# Altium PCB Bop-it_main_PCB.PcbDoc
Units mil, origin at the board's own origin, x right, y up, seen from the top; angles counter-clockwise.
Board outline 3608.89 x 2382.47 mil, 2 copper layers (Top Layer, Bottom Layer); 26 components, 22 nets, 99 pads, 4 vias.
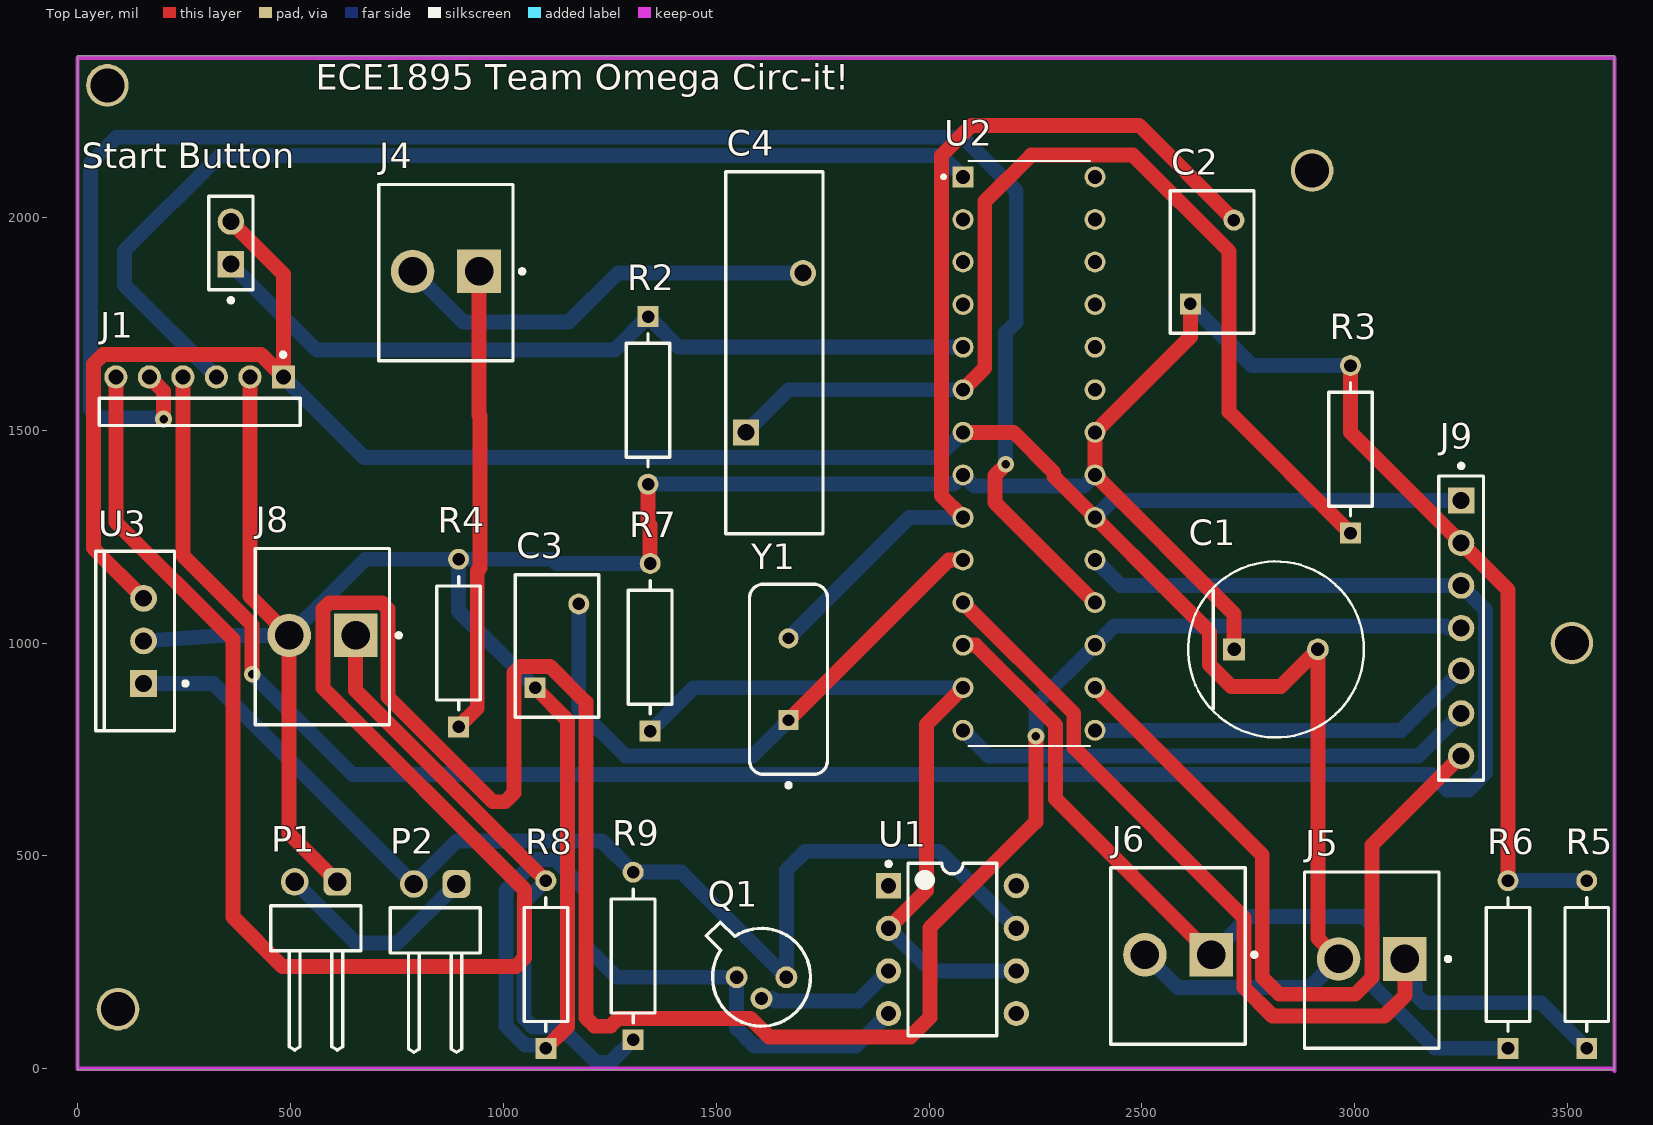
[diagram p0: Top Layer view]
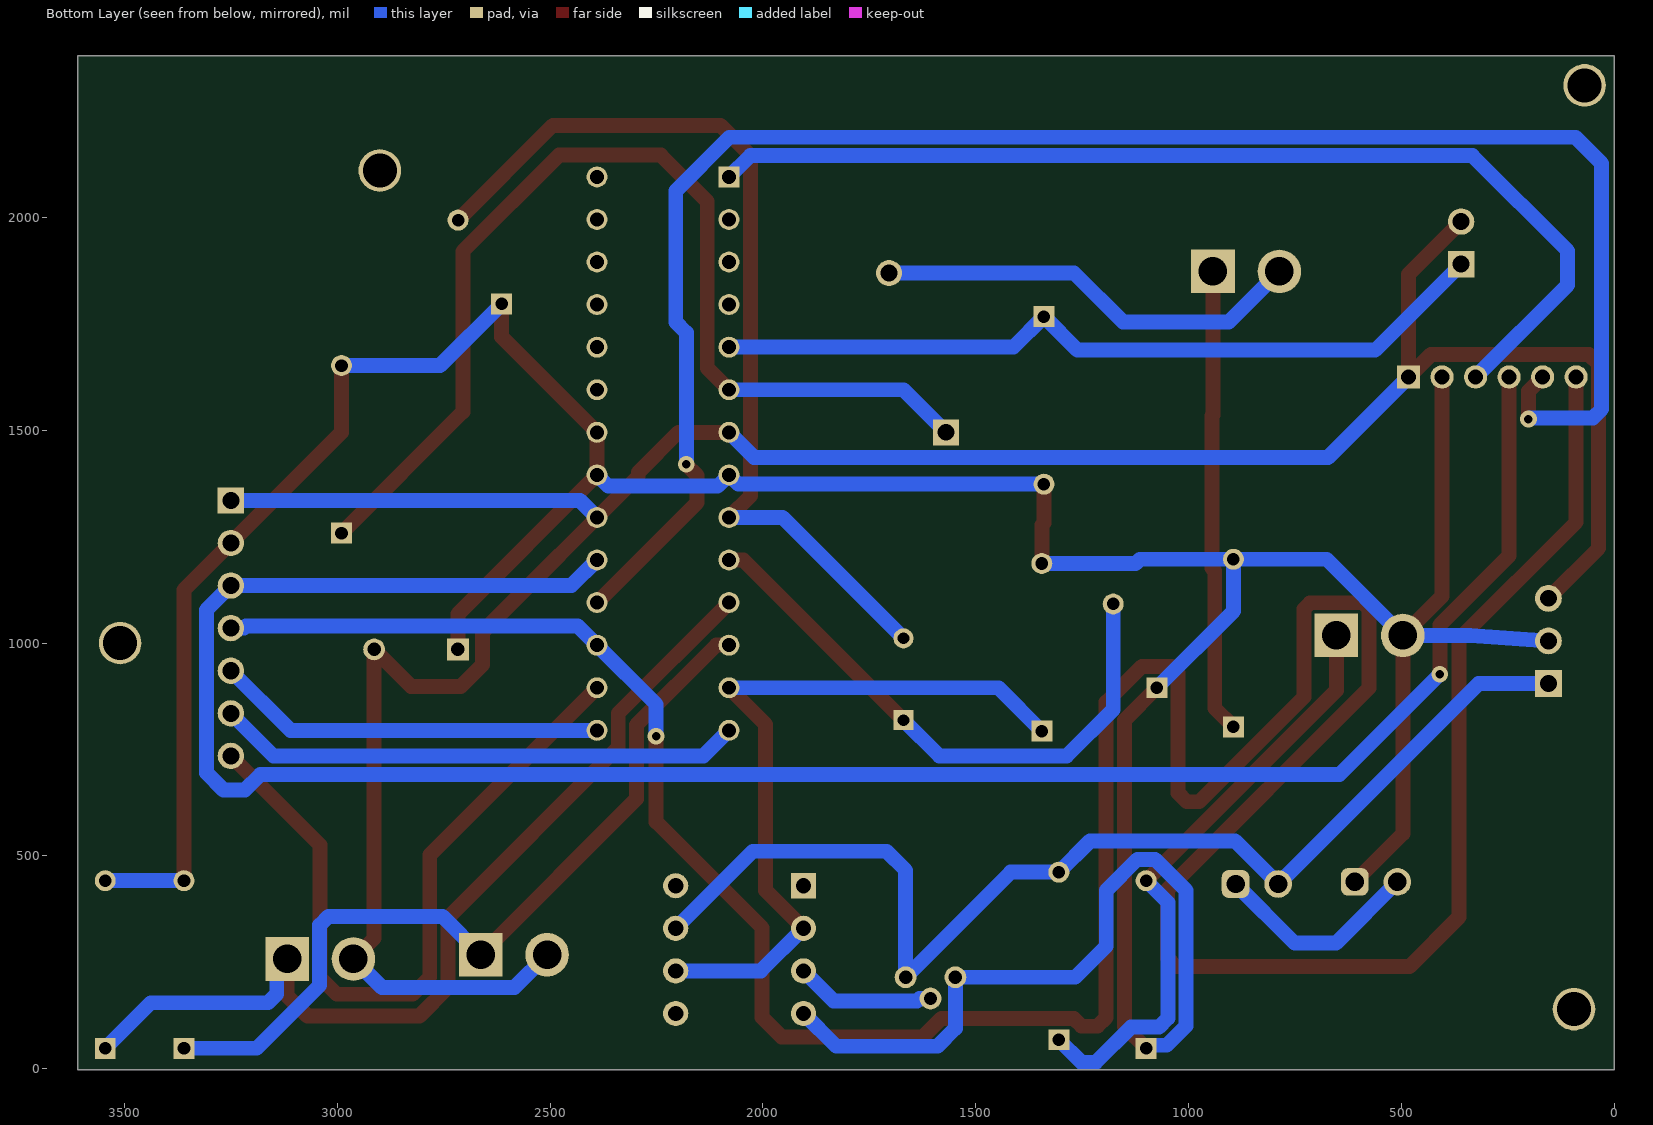
[diagram p1: Bottom Layer view, seen from below]
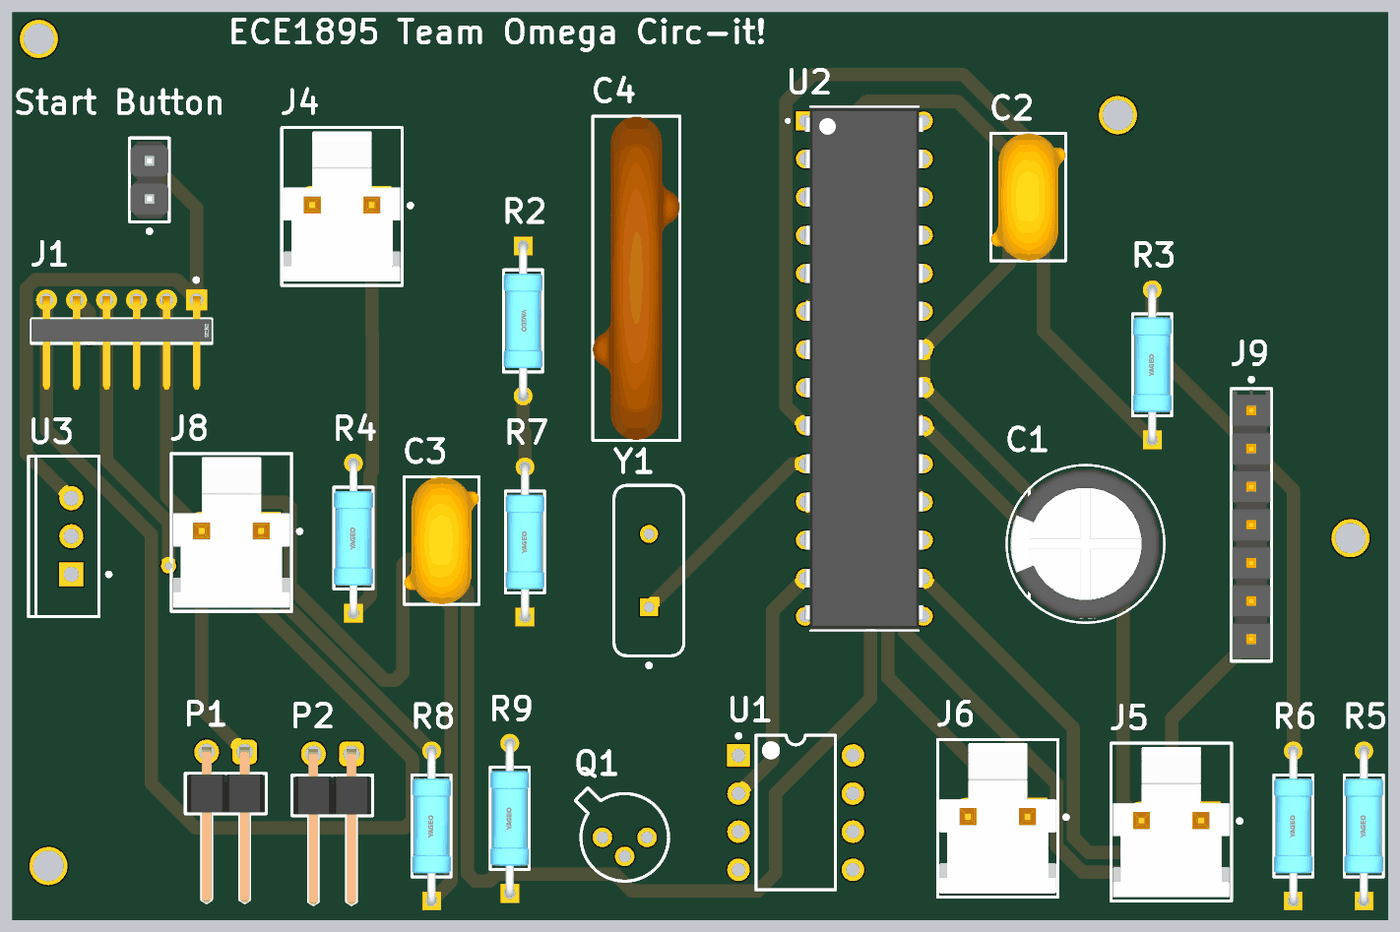
[diagram p2: 3D render of the assembled board from above, using the file's embedded part models]

## Layer stack, top to bottom
Top Solder: solder mask 0.4, Solder Resist, Dk 3.5
Top Layer: signal copper 1.4
Dielectric 1: dielectric 12.6, FR-4, Dk 4.8
Bottom Layer: signal copper 1.4
Bottom Solder: solder mask 0.4, Solder Resist, Dk 3.5

## Board outline
0.11,-2.5 3609,-2.5 3609,2379.97 0.11,2379.97

## Design rules (kind name [scope] priority, off if disabled: settings)
BoardOutlineClearance [All] p1: gap=7.87 ignorepadtopadclearanceinfootprint=FALSE except(15.75: Arc-SplitBarrior Arc-SplitContinuation Track-SplitBarrior Track-SplitContinuation SMDPad-SplitBarrior SMDPad-SplitContinuation THPad-SplitBarrior THPad-SplitContinuation Via-SplitBarrior Via-SplitContinuation Fill-SplitBarrior Fill-SplitContinuation Poly-SplitBarrior Poly-SplitContinuation Region-SplitBarrior Region-SplitContinuation Text-SplitBarrior Text-SplitContinuation)
Clearance "Clearance Bottom Layer" [OnLayer('Bottom Layer')] p1: gap=8 ignorepadtopadclearanceinfootprint=TRUE except(10: Arc-Text Track-Text SMDPad-Text THPad-Text Via-Text Fill-Text Poly-Text Region-Text Text-Text)
Clearance "Clearance Top Layer" [OnLayer('Top Layer')] p2: gap=8 ignorepadtopadclearanceinfootprint=TRUE except(10: Arc-Text Track-Text SMDPad-Text THPad-Text Via-Text Fill-Text Poly-Text Region-Text Text-Text)
Clearance Clearance_1 [OnMid vs OnMid] p3: gap=7.87 ignorepadtopadclearanceinfootprint=FALSE except(3.5: Arc-Arc Arc-Track Arc-SMDPad Track-Track Track-SMDPad SMDPad-SMDPad; 5: Arc-Via Track-Via SMDPad-Via THPad-Via Via-Via; 10: Arc-Text Track-Text SMDPad-Text THPad-Text Via-Text Fill-Text Poly-Text Region-Text Text-Text)
Clearance Clearance_2 [(ExistsOnLayer('Top Layer') Or ExistsOnLayer('Bottom Layer')) vs (ExistsOnLayer('Top Layer') Or ExistsOnLayer('Bottom Layer'))] p4: gap=7.87 ignorepadtopadclearanceinfootprint=FALSE except(3.5: Arc-Arc Arc-Track Arc-SMDPad Track-Track Track-SMDPad SMDPad-SMDPad; 5: Arc-Via Track-Via SMDPad-Via THPad-Via Via-Via; 10: Arc-Text Track-Text SMDPad-Text THPad-Text Via-Text Fill-Text Poly-Text Region-Text Text-Text)
Clearance [All] p5: gap=7.87 ignorepadtopadclearanceinfootprint=FALSE except(3.5: Arc-Arc Arc-Track Arc-SMDPad Track-Track Track-SMDPad SMDPad-SMDPad; 5: Arc-Via Track-Via SMDPad-Via THPad-Via Via-Via; 10: Arc-Text Track-Text SMDPad-Text THPad-Text Via-Text Fill-Text Poly-Text Region-Text Text-Text)
HoleSize [All] p1: absolutevalues=TRUE maxlimit=248.03 minlimit=7.87 maxpercent=80.000 minpercent=20.000
MinimumAnnularRing [All] p1: minimumring=3
MinimumSolderMaskSliver [All] p1: minsoldermaskwidth=3.94
PolygonConnect PolygonConnect_1 [All] p1: thpad.connectstyle=Relief thpad.reliefconductorwidth=20 thpad.reliefentries=4 thpad.polygonreliefangle="90 Angle" thpad.airgapwidth=10 smdpad.connectstyle=Relief smdpad.reliefconductorwidth=20 smdpad.reliefentries=4 smdpad.polygonreliefangle="90 Angle" smdpad.airgapwidth=10 via.connectstyle=Direct via.reliefconductorwidth=20 via.reliefentries=4 via.polygonreliefangle="90 Angle" via.airgapwidth=10
RoutingCorners [All] p1: cornerstyle=Round minsetback=100 maxsetback=100
RoutingVias [All] p1: holewidth=19.68 width=39.37 viastyle="Through Hole" minholewidth=7.87 minwidth=17.72 maxholewidth=39.37 maxwidth=78.74
SilkToSilkClearance [All] p1: silktosilkclearance=3.94
SilkToSolderMaskClearance [IsPad] p1: minsilkscreentomaskgap=3.94 clearancetoexposedcopper=TRUE
SolderMaskExpansion [All] p1: expansion=4 istentingtop=FALSE
Width MaxMinWidth_1 [All] p1: maxlimit=150 minlimit=10 preferedwidth=35 minimp=50.000000 maximp=50.000000 favimp=50.000000
Width [All] p2: maxlimit=100 minlimit=3.5 preferedwidth=15
25 further rules are at their usual default settings.

## Components (designator, comment, footprint, x,y, rotation, side; value= is the part's Value field where it differs from the comment)
C1 "EEUED2G100" FP-RAD-TH-D_10_0_5-L_20_2-MFG 2815,985 r0 top
C2 "F471K33Y5RP6UK5R" FP-F471K33Y5RP6UK5R-MFG 2665,1895 r90 top
C3 "F471K33Y5RP6UK5R" FP-F471K33Y5RP6UK5R-MFG 1126.18,993.43 r90 top
C4 ".047uF" FP-440LS10-R-MFG 1636.93,1682.01 r90 top
J1 "PRGRM" FP-TMM-106-01-G-S-RA-MFG 286.89,1545.47 r0 top
J4 "Speaker" FP-26-61-4020-MFG 865,1870 r0 top
J5 "Test" FP-26-61-4020-MFG 3040,255 r0 top
J6 "Press" FP-26-61-4020-MFG 2585,265 r0 top
J8 "UV emitter" FP-26-61-4020-MFG 575,1015 r0 top
J9 "OLED" FP-TSW-107-07-G-S-MFG 3250,1035 r270 top
P1 "Battery" 61300211021 560,330 r0 top
P2 "On Switch" 61300211021 840,325 r0 top
Q1 "2N2222" MLTC-TO-18-3 1606.54,215 r0 top
R2 "6700" FP-MFR-25-MFG 1340,1570 r270 top value=1.18kΩ
R3 "1000" FP-MFR-25-MFG 2990,1455 r90 top value=1.18kΩ
R4 "1000" FP-MFR-25-MFG 895,1000 r90 top value=1.18kΩ
R5 "1000" FP-MFR-25-MFG 3545,245 r90 top value=1.18kΩ
R6 "1000" FP-MFR-25-MFG 3360,245 r90 top value=1.18kΩ
R7 "1000" FP-MFR-25-MFG 1345,990 r90 top value=1.18kΩ
R8 "180" FP-MFR-25-MFG 1100,245 r90 top value=1.18kΩ
R9 "670" FP-MFR-25-MFG 1305,265 r90 top value=1.18kΩ
"Start Button" "M20-9990246" FP-M20-9990246-MFG 360,1940 r90 top
U1 "LM741CN" N08E 2055,280 r0 top
U2 "ATMEGA328-PU" DIP787W46P254L3467H508Q28 2235,1445 r0 top
U3 "LM340T-5.0" NDE0003A 155,1005 r90 top
Y1 "Crystal" FOX-FOXSLF080-20 1670,915 r90 top

## Footprints (in the part's own frame and the unit in brackets; to place one, negate y for a bottom-side part, rotate by r counter-clockwise, add the part's x,y. Pads: shape width x height; smd on the part's side, far side on the other; paste and mask are expansions set on the pad)
61300211021 [mm] "Pin Header, pitch 2.54 mm, THT, Angled, single row, 2p"
  rrect50% 1.65x1.65 hole 1.1: 1(1.27,2.77)
  round 1.65 hole 1.1: 2(-1.27,2.77)
  silkscreen extent -2.69,-7.27 2.69,1.34, body extent -2.54,-7.27 2.54,3.09, height 2.58
DIP787W46P254L3467H508Q28 [mm]
  rect 1.25x1.25 / inner round 1.25 / far side rect 1.25x1.25 hole 0.83: 1(-3.937,16.51)
  round 1.25 hole 0.83: 2(-3.937,13.97) 3(-3.937,11.43) 4(-3.937,8.89) 5(-3.937,6.35) 6(-3.937,3.81) 7(-3.937,1.27) 8(-3.937,-1.27) 9(-3.937,-3.81) 10(-3.937,-6.35) 11(-3.937,-8.89) 12(-3.937,-11.43) 13(-3.937,-13.97) 14(-3.937,-16.51) 15(3.937,-16.51) 16(3.937,-13.97) 17(3.937,-11.43) 18(3.937,-8.89) 19(3.937,-6.35) 20(3.937,-3.81) 21(3.937,-1.27) 22(3.937,1.27) 23(3.937,3.81) 24(3.937,6.35) 25(3.937,8.89) 26(3.937,11.43) 27(3.937,13.97) 28(3.937,16.51)
  silkscreen extent -5.2,-17.45 3.62,17.45, body extent -3.95,-17.34 3.95,17.34, height 4.57
FOX-FOXSLF080-20 [mm] "THD, 2-Leads, Body 11.35x4.65mm"
  rect 1.2x1.2 hole 0.7: 1(-2.44,0)
  round 1.2 hole 0.7: 2(2.44,0)
  silkscreen extent -6.45,-2.33 5.68,2.33, body extent -5.67,-2.32 5.68,2.33, height 3.6
FP-26-61-4020-MFG [mm]
  rect 2.6x2.6 hole 1.7 paste-2539.97 mask+0: 1(1.98,0.075)
  round 2.6 hole 1.7 paste-2539.97 mask+0: 2(-1.98,0.075)
  silkscreen extent -4.01,-5.26 4.68,5.26, body extent -4.11,-5.36 4.11,5.36, height 0.25
FP-440LS10-R-MFG [mm]
  rect 1.55x1.55 hole 1 paste-2539.97 mask+0: 1(-4.75,1.7)
  round 1.55 hole 1 paste-2539.97 mask+0: 2(4.75,-1.7)
  silkscreen extent -10.8,-2.9 10.8,2.9, body extent -10.9,-3 10.9,3, height 0.25
FP-F471K33Y5RP6UK5R-MFG [mm]
  rect 1.25x1.25 hole 0.75 paste-2539.97 mask+0: 1(-2.5,1.3)
  round 1.25 hole 0.75 paste-2539.97 mask+0: 2(2.5,-1.3)
  silkscreen extent -4.25,-2.5 4.25,2.5, body extent -4.35,-2.6 4.35,2.6, height 0.25
FP-M20-9990246-MFG [mm]
  rect 1.57x1.57 hole 1.02 paste-2539.97 mask+0: 1(-1.27,0)
  round 1.57 hole 1.02 paste-2539.97 mask+0: 2(1.27,0)
  silkscreen extent -3.55,-1.32 2.79,1.32, body extent -2.89,-1.42 2.89,1.42, height 0.25
FP-MFR-25-MFG [mm]
  rect 1.25x1.25 hole 0.75 paste-2539.97 mask+0: 1(-5,0)
  round 1.25 hole 0.75 paste-2539.97 mask+0: 2(5,0)
  silkscreen extent -3.97,-1.3 3.97,1.3, body extent -5.72,-1.4 5.72,1.4, height 0.25
FP-RAD-TH-D_10_0_5-L_20_2-MFG [mm]
  rect 1.3x1.3 hole 0.8 paste-2539.97 mask+0: 1(-2.5,0)
  round 1.3 hole 0.8 paste-2539.97 mask+0: 2(2.5,0)
  silkscreen extent -5.25,-5.25 5.25,5.25, body extent -5.35,-5.35 5.35,5.35, height 0.25
FP-TMM-106-01-G-S-RA-MFG [mm]
  rect 1.39x1.39 hole 0.89 paste-2539.97 mask+0: 1(5,2.02)
  round 1.39 hole 0.89 paste-2539.97 mask+0: 2(3,2.02) 3(1,2.02) 4(-1,2.02) 5(-3,2.02) 6(-5,2.02)
  silkscreen extent -6,-0.88 6,3.47, body extent -6.1,-4.3 6.1,2.82, height 0.25
FP-TSW-107-07-G-S-MFG [mm]
  rect 1.57x1.57 hole 1.02 paste-2539.97 mask+0: 1(-7.62,0)
  round 1.57 hole 1.02 paste-2539.97 mask+0: 2(-5.08,0) 3(-2.54,0) 4(0,0) 5(2.54,0) 6(5.08,0) 7(7.62,0)
  silkscreen extent -9.8,-1.34 9.08,1.34, body extent -9.18,-1.44 9.18,1.44, height 0.25
MLTC-TO-18-3 [mm] "TO-18, 3-Leads"
  round 1.3 hole 0.8: 1(-1.485,0) 2(0,-1.27) 3(1.485,0)
  silkscreen extent -3.29,-2.92 2.92,3.29, body extent -3.29,-2.93 2.93,3.29, height 5.33
N08E [mm] "DIP, 8-Pin, Row Spacing 7.62 mm, Pitch 2.54 mm"
  rect 1.5x1.5 hole 0.9: 1(-3.81,3.81)
  round 1.5 hole 0.9: 2(-3.81,1.27) 3(-3.81,-1.27) 4(-3.81,-3.81) 5(3.81,-3.81) 6(3.81,-1.27) 7(3.81,1.27) 8(3.81,3.81)
  silkscreen extent -3.93,-5.15 2.65,5.23, body extent -3.6,-5.15 3.6,5.15, height 5.33
NDE0003A [mm] "FM, 3-Leads, Body 10.7x4.7mm, Pitch 2.54mm"
  rect 1.6x1.6 hole 1: 1(-2.54,0)
  round 1.6 hole 1: 2(0,0) 3(2.54,0)
  silkscreen extent -5.35,-2.63 5.35,2.85, body extent -5.4,-1.9 5.4,2.9, height 19.4

## Part data
C1: library part CMP-05427-001613-1, "Aluminum Electrolytic Capacitors (Radial Lead Type) 10uF ±20% 400V", Capacitance=10uF, Case/Package=Radial, Dielectric Material=Aluminium, Max Operating Temperature=105°C, Min Operating Temperature=-25°C, Package Quantity=200, Ripple Current=300mA, Tolerance=20%, Voltage=400V, Construction=RADIAL, Contact Plating=Tin, Diameter=10mm, Dissipation Factor=0.24%, Height=20mm, Height - Seated (Max)=0.787inch, Lead Diameter=0.6mm, Lead Free="Lead Free", Lead Pitch=5mm, Length=20mm, Life (Hours)=8000Hour, Mount="Through Hole", Number of Pins=2, Packaging=Bulk, Polarity=Polar, Radiation Hardening=No, REACH SVHC="No SVHC", Ripple Current (AC)=300mA, RoHS Compliant=Yes, Series=ED, Termination=Radial, Voltage Rating=400V, Voltage Rating (DC)=400V
C2 C3: library part CMP-02417-000080-1, "CAP CER 470PF 2KV Y5R RADIAL", Capacitance=470pF, Case/Package=Radial, Dielectric=Y5R, Dielectric Material=Ceramic, Insulation Resistance=10GR, Max Operating Temperature=125°C, Min Operating Temperature=-30°C, Package Quantity=1500, Tolerance=10%, Voltage=2kV, Construction=RADIAL, Depth=5mm, Lead Diameter=0.8mm, Lead Pitch=5mm, Lead/Base Style=Kinked, Length=8.5mm, Mount="Through Hole", Packaging="Tape and Reel", Radiation Hardening=No, Resistor Type=Ceramic, RoHS Compliant=Yes, Series=F, Termination=Radial, Voltage Rating=2kV
C4: library part CMP-02417-000073-1, "CAP CER 10000PF 760VAC Y5U RDL", Capacitance=10nF, Case/Package=Radial, Dielectric=Y5U, Max Operating Temperature=125°C, Min Operating Temperature=-30°C, Package Quantity=100, Resistor Type=Ceramic, Tolerance=20%, Voltage=760V, Voltage Rating=250V, Voltage Rating (AC)=500V, Construction=RADIAL, Contact Plating=Tin, Depth=5.8mm, Diameter=21.6mm, Dissipation Factor=2%, Height=5.8mm, Height - Seated (Max)=0.976inch, Lead Diameter=0.81mm, Lead Free="Lead Free", Lead Length=28.8mm, Lead Pitch=9.5mm, Mount="Through Hole", Number of Pins=2, Packaging=Bulk, Radiation Hardening=No, RoHS Compliant=Yes, Series=440L, Termination=Radial
J1: library part CMP-02766-001725-1, "Connector Header Through Hole, Right Angle 6 position 0.079\" (2.00mm)", Color=Black, Max Current Rating=3.9A, Max Operating Temperature=125°C, Max Voltage Rating (AC)=500V, Min Operating Temperature=-55°C, Connector Type=Header, Contact Finish - Mating=GOLD, Contact Material=Bronze, Contact Mating Length=0.126inch, Contact Plating=Gold, Contact Shape=Square, Contact Type="Male Pin", Depth=5.97mm, Fastening Type=Pull, Gender=Male, Housing Color=Black, Housing Material=Polymer, Insulation Color=Black, Insulation Material=Polymer, Length=12mm, Mount="Through Hole", Number of Contacts=6, Number of Positions=6, Number of Rows=1, Orientation="Right Angle", Packaging=Bulk, Pitch=2mm, Radiation Hardening=No, RoHS Compliant=Yes, Series=TMM, Termination=Solder
J4 J5 J6 J8: library part CMP-00257-00277943-1, "26-61-4020 3.96mm (.156\") Pitch KK® Solid Header, Vertical, Friction Lock, 2 Circuits, Gold (Au) Plating", Color=Natural, Contact Resistance=6mΩ, Current Rating=7A, Flammability Rating="UL94 V-0", Insulation Resistance=50GΩ, Manufacturer Lifecycle Status=ACTIVE, Max Operating Temperature=75°C, Max Voltage Rating (AC)=250V, Min Operating Temperature=0°C, Contact Material=Brass, Contact Plating=Gold, Country of Origin=US, Depth=10.01mm, Gender=Male, Glow Wire Compliant=Non-compliant, Height=14.73mm, Housing Color=Natural, Housing Material=Polyester, Lead Free="Lead Free", Lead Pitch=3.96mm, Length=7.77mm, Lifecycle Status=Production, Max Current Rating=7A, Mount="Through Hole", NexarPartId=277943, Number of Circuits=2, Number of Contacts=2, Number of Positions=2, Number of Rows=1, Orientation="Right Angle, Vertical", Packaging=Bulk, Pitch=3.96mm, Radiation Hardening=No, REACH SVHC=Unknown, RoHS=Compliant, Schedule B=8536694040, Termination=Solder, Voltage Rating=250V, Voltage Rating (DC)=250V
J9: library part CMP-02766-000065-1, "CONN HEADER VERT 7POS 2.54MM", Manufacturer=SAMTEC, Manufacturer Part Number=TSW-107-07-G-S, Package=0, Temperature="-55°C to +125°C", Temperature Range High=+125°C, Temperature Range Low=-55°C, Automotive=No, Category=Conn, ComponentLink2Description=Datasheet, ComponentLink2URL=http://suddendocs.samtec.com/prints/tsw-xxx-xx-xxx-x-xx-xxx-mkt.pdf, Conn Gender=Male, Conn Orientation=Straight, Contact Material=Gold,Nickel, Device Class L1=Connectors, Device Class L2="Headers and Wire Housings", Device Class L3=unset, Digikey Description="CONN HEADER VERT 7POS 2.54MM", Footprint Url=http://suddendocs.samtec.com/prints/tsw-xxx-xx-x-x-xx-xxx-footprint.pdf, Height=8.71mm, Lead Free=Yes, Mouser Description="Conn Unshrouded Header HDR 7 POS 2.54mm Solder ST Thru-Hole Automotive Bulk", Number of Contacts=7, Number of Rows=1, Octopart=https://octopart.com/tsw-107-07-g-s-samtec-272202, Pitch=2.54mm, RoHS=TRUE
P1 P2: library part CMP-1502-01059-2, Color=Black, Contact Resistance=20mΩ, Current Rating=3A, Operating Supply Voltage=250V, Connector Type="Male Pin", Contact Material=Copper, Contact Mating Length=5.9944mm, Contact Plating=Gold, Gender=Male, Lead Pitch=2.54mm, Mount="Through Hole", NexarPartId=32855519, Number of Contacts=2, Number of Pins=2, Number of Positions=2, Number of Rows=1, Packaging=Bulk, Pitch=2.54mm, REACH SVHC=Unknown, RoHS=Compliant, Termination=Solder
Q1: library part CMP-2000-05237-1, "Low Power Bipolar NPN Transistor, 30 V, -65 to 200 degC, 3-Pin TO-18, RoHS, Bulk", Collector Emitter Voltage V(br)ceo=30V, Collector Emitter Voltage Vces=400mV, Continuous Collector Current Ic Max=800mA, Current Ic @ Vce Sat=150mA, DC Current Gain hFE=100, Full Power Rating Temperature=25degC, Manufacturer=Multicomp, Package / Case=TO-18, Package Description="3-Pin Transistor Outline Package (TO-18), Dia 5.54 mm, Pitch Pitch 1.485mm", Package Reference=TO-18-3, Power Dissipation Pd=500mW, Voltage Vcbo=60V, Current Ic Continuous a Max=800mA, Current Ic hFE=150mA, Datasheet URL=http://www.farnell.com/datasheets/1662272.pdf, Datasheet Version="Rev. 1.1, 05/2012", DC Collector Current=800mA, Gain Bandwidth ft Min=250MHz, Gain Bandwidth ft Typ=250MHz, Hfe Min=100, Manufacturer URL=http://uk.farnell.com/b/multicomp, No. of Pins=3, No. of Transistors=1, Pin Configuration=a, Power Dissipation Ptot Max=500mW, SVHC=NoSVHC(19-Dec-2012), Transistor Case Style=TO-18, Transistor Polarity=NPN
R2 R3 R4 R5 R6 R7 R8 R9: library part CMP-03413-000001-1, "RES 1.18K OHM 1/4W 1% AXIAL", Manufacturer=Yageo, Manufacturer Part Number=MFR-25FBF52-1K18, Package=MFR-25, Power Rating=0.25W, Resistance=1.18kΩ, Temperature="-55°C to +155°C", Temperature Coefficient=100ppm/°C, Temperature Range High=+155°C, Temperature Range Low=-55°C, Tolerance=1%, Voltage Rating=250V, Automotive=No, Category=Res, ComponentLink2Description=Datasheet, ComponentLink2URL=https://www.yageo.com/upload/media/product/products/datasheet/lr/Yageo_LR_MFR_1.pdf, Composition="Metal Film", Device Class L1="Passive Components", Device Class L2=Resistors, Device Class L3="Through-Hole Resistors", Digikey Description="RES 1.18K OHM 1/4W 1% AXIAL", Height=2.6mm, Ipc Land Pattern Name=RESAD1000W75L680D260, Lead Free=Yes, Mouser Description="Metal Film Resistors 1.18K OHM 1/4W 1%", Octopart=https://octopart.com/mfr-25fbf52-1k18-yageo-56251681, RoHS=TRUE, Series=MFR
"Start Button": library part CMP-15831-000009-1, "CONN HEADER VERT 2POS 2.54MM", Current Rating=3A, Manufacturer=Harwin, Temperature="-40°C to +105°C", Temperature Range High=+105°C, Temperature Range Low=-40°C, Automotive=No, Category=Conn, ComponentLink2Description=Datasheet, ComponentLink2URL=https://cdn.harwin.com/pdfs/M20-999.pdf, Conn Gender=Male, Conn Orientation=Vertical, Contact Material=Tin,Nickel, Device Class L1=Connectors, Device Class L2="Headers and Wire Housings", Device Class L3=unset, Digikey Description="CONN HEADER VERT 2POS 2.54MM", Height=8.99mm, Lead Free=Yes, Manufacturer Part Number=M20-9990246, Mouser Description="2.54mm (0.1\") Pitch SIL Vertical PC Tail Pin Header, 6.1mm mating pin height, tin, 2 contacts", Number of Contacts=2, Number of Rows=1, Octopart=https://octopart.com/m20-9990246-harwin-2590635, Package=M20-9990246, Pitch=2.54mm, RoHS=TRUE
U1: library part CMP-0055-00155-2, "Operational Amplifier, 8-pin MDIP", Manufacturer="National Semiconductor", PackageTopMarking=NSUZXYTTE#*LM*741CN, PowerWise=N, Code_JEDEC=MS-001-BA, ComponentLink1Description="LM741 Datasheet", ComponentLink1URL=http://www.national.com/ds/LM/LM741.pdf, ComponentLink2Description="LM741 Web Page", ComponentLink2URL=http://www.national.com/pf/LM/LM741.html, ComponentLink3Description="N08E Package Page", ComponentLink3URL=http://www.national.com/packaging/folders/n08e.html, CompType=Amplifiers, DatasheetVersion=Aug-2000, PackageDescription="MDIP, .365 x .250 x .130in, 8 Lead, .100in Pitch", PackageReference=N08E, PackageVersion="revG, May-2006", PinCount=8, RevisionNote="Component URLs added", RoHS=N
U2: "AVR AVRÂ® ATmega Microcontroller IC 8-Bit 20MHz 32KB (16K x 16) FLASH 28-PDIP", Package="DIP-28 Microchip Technology", Availability="In Stock", Check_prices=https://www.snapeda.com/parts/ATMEGA328-PU/Microchip/view-part/?ref=eda, MF=Microchip, MP=ATMEGA328-PU, Price=None, Purchase-URL=https://pricing.snapeda.com/search/part/ATMEGA328-PU/?ref=eda, SnapEDA_Link=https://www.snapeda.com/parts/ATMEGA328-PU/Microchip/view-part/?ref=snap
U3: library part CMP-0062-02468-3, "Series 3-Terminal Positive Regulators, 3-pin TO-220", Manufacturer="Texas Instruments", PackageTopMarking="NSUZXYTTE#*LM340T5*7805 P+", PowerWise=N, ComponentLink1Description="Datasheet URL", ComponentLink1URL=http://www.ti.com/general/docs/lit/getliterature.tsp?genericPartNumber=LM340-N&fileType=pdf, CompType="LDO IC", PackageDescription="TO-220, Molded, 3 Lead, Straight", PackageReference=NDE0003A, PinCount=3, RoHS=N
Y1: library part CMP-1749-00002-1, "Resistance Weld Thru-Hole Crystal, 8 MHz, -20 to 70 degC, 2-Pin THD, RoHS, Bulk", Case\Package=TO-263-3, Dropout Voltage="2 V", Max Input Voltage="35 V", Max Operating Temperature="125 degC", Max Ouput Current="1 A", Min Input Voltage="7 V", Min Operating Temperature="0 degC", Nominal Output Voltage="5 V", Package Quantity=50, ComponentLink1Description="Manufacturer URL", ComponentLink1URL=http://www.foxonline.com/, ComponentLink2Description=Datasheet, ComponentLink2URL=http://download.siliconexpert.com/pdfs/2015/4/5/6/5/7/200/fox_/manual/35607121449963728hc49slf.pdf, DatasheetVersion=Mar-15, Height="30.02 mm", Length="10.24 mm", Mount="Surface Mount", Output Current="1 A", Output Voltage="5 V", Outputs=1, PackageDescription="2-Pin Through Hole Device, Body 11.35 x 4.65 mm", PackageReference=FOXSLF080-20, Packaging=Rail/Tube, Pins=3, Radiation Hardening=No, REACH SVHC="No SVHC", RoHSCompliant=true, Width="9.35 mm"

## Free pads (board coordinates)
  round 100 hole 80: 1(70,2310) 1(95,140) 1(2900,2110) 1(3510,1000)

## Via types
v1: diameter 39.37, hole 19.68, Top Layer to Bottom Layer, 4 vias

## Nets (pads, with @x,y where several pads share a name; then routed paths per layer and width w, separated by ;. In a path a pad name is that pad's centre, name@x,y a point inside that pad or via, vN(x,y) a via of type N, cw(c..) or ccw(c..) an arc to the next point about the centre after c; other vN are vias at no path point)
NetC1_1: C1.1 C2.1 C3.1 J1.2 J8.2 J9.2 P1.1 Q1.1 R2.2 R3.2 R4.2 R5.2 R6.2 R7.2 R8.1 U1.4 U2.8 U2.21 U2.22 U3.2 | length 9832.4
  Top Layer w35: J1.2 405,1110 J8.2 497.05,552.01 P1.1 ; C3.1 1151,819 1151,99.15 R8.1 ; R2.2 1340,1282 1345,1277 R7.2 ; C2.1 2613.82,1718.82 U2.22 U2.21 2716.57,1068.43 C1.1 ; R3.2 2990,1495 J9.2 3360,1125 R6.2
  Bottom Layer w35: U3.2 338.95,1017.95 J8.2 675.95,1196.85 R4.2 ; C3.1 895,1075 R4.2 ; R8.1 1092.89,55.26 1051.69,55.26 1006,100.95 1006,418.71 1079.25,491.96 1120.75,491.96 1193.8,418.91 1193.8,288.05 1266.85,215 Q1.1 1548.07,94.93 1590,53 1828,53 U1.4 ; R2.2 2058.15,1373.15 U2.8 2106.43,1368.57 2363.57,1368.57 U2.21 ; R7.2 1125,1186.85 1115,1196.85 R4.2 ; C2.1 2758.54,1651.85 R3.2 ; R6.2 R5.2
NetC1_2: "Start Button.2" C1.2 J1.1 J5.2 J6.2 J9.1 U2.7 U2.20 U3.3 | length 6497.9
  Top Layer w35: U3.3 37,1223 37,1655 60,1678 430.74,1678 J1.1 483.74,1866.26 360,1990 ; U2.7 2198.9,1495 2293.09,1400.81 2293.09,1391.91 2659,1026 2659,949 2710,898 2826.43,898 C1.2 2913.43,306.57 J5.2
  Bottom Layer w35: J1.1 672.93,1435.81 2020.81,1435.81 U2.7 ; U2.20 2430,1335 J9.1 ; J6.2 2584,191 2895.1,191 J5.2
NetC2_2: C2.2 U2.9 Y1.2 | length 2207.5
  Top Layer w35: U2.9 2029,1346 2029,2145 2100,2216 2493.61,2216 C2.2
  Bottom Layer w35: Y1.2 1953.94,1295 U2.9
NetC3_2: C3.2 U2.10 Y1.1 | length 1386.2
  Top Layer w35: Y1.1 2046.06,1195 U2.10
  Bottom Layer w35: C3.2 1177.36,844 1286.36,735 1586.06,735 Y1.1
NetC4_1: C4.1 R3.1 U2.6 | length 2507.2
  Top Layer w35: U2.6 2131,1646 2131,2037 2240,2146 2479,2146 2705,1920 2705,1543.15 R3.1
  Bottom Layer w35: C4.1 1670,1595 U2.6
NetC4_2: C4.2 J4.2 | length 1013.7
  Bottom Layer w35: J4.2 906,1754 1154,1754 1269.02,1869.02 C4.2
NetJ1_3: J1.3 U2.1 | length 2469.2
  Bottom Layer w35: J1.3 110,1841.26 110,1921.26 333.74,2145 2030,2145 U2.1
NetJ1_4: J1.4 J9.3 U2.19 | length 5139.9
  Top Layer w35: J1.4 247.52,1205 410.19,1042.33 v1(410.19,927)
  Bottom Layer w35: v1(410.19,927) 646.19,691 3181,691 3217,655 3267,655 3307,695 3307,1078 J9.3 2450,1135 U2.19
NetJ1_5: J1.5 U2.18 | length 4209.5
  Top Layer w35: J1.5 202,1591.78 v1(202,1526) ; v1(2180,1420) 2180,1418.82 2154.69,1393.5 2154.69,1330.31 U2.18
  Bottom Layer w35: v1(202,1526) 199,1529 50.5,1529 30,1549.5 30,2126.5 91.5,2188 2079,2188 2205,2062 2205,1754.09 2180,1729.09 v1(2180,1420)
NetJ1_6: J1.6 J9.4 U2.17 | length 7927.3
  Top Layer w35: J1.6 90.04,1283.96 365,1009 365,356.5 481.5,240 1029.39,240 1049.89,260.5 1049.89,421.1 576.27,894.72 576.27,1079.7 591.21,1094.63 714.7,1094.63 729.63,1079.7 729.63,873.03 975.4,627.26 1004.39,627.26 1024.89,647.77 1024.89,930.17 1039.83,945.11 1110.17,945.11 1194,861.28 1194,120.5 1214.5,100 1251.57,100 1269.83,118.26 1581.03,118.26 1624.31,74.97 1956.47,74.97 2002,120.5 2002,331 2251,580 v1(2251,781)
  Bottom Layer w35: v1(2251,781) 2251,856 U2.17 2435,1040 3214,1040 3219,1035 J9.4
NetJ4_1: J4.1 R4.1 | length 1091.4
  Top Layer w35: R4.1 938.89,847.04 938.89,1169.88 945.11,1176.1 945.11,1533.89 942.95,1536.05 J4.1
NetJ5_1: J5.1 R5.1 U2.11 | length 2237.2
  Top Layer w35: U2.11 2339.89,835.11 2339.89,755 2739.63,355.26 2739.63,191.27 2806.95,123.95 3070,123.95 3117.95,171.9 J5.1
  Bottom Layer w35: J5.1 3142.11,233.79 3142.11,175.5 3162.61,155 3438.15,155 R5.1
NetJ6_1: J6.1 R6.1 U2.12 | length 1931.4
  Top Layer w35: U2.12 2109.69,995 2296.89,807.8 2296.89,634.01 J6.1
  Bottom Layer w35: J6.1 2753,358 3020.77,358 3041.27,337.5 3041.27,196.21 3189.33,48.15 R6.1
NetJ8_1: J8.1 R8.2 R9.1 | length 1426.5
  Top Layer w35: J8.1 652.95,888.9 R8.2
  Bottom Layer w35: R8.2 1049,390.85 1049,118.76 1069.5,98.26 1135.17,98.26 1218.43,15 1251.85,15 R9.1
NetJ9_5: J9.5 U2.15 | length 918
  Bottom Layer w35: U2.15 3110,795 J9.5
NetJ9_6: J9.6 U2.14 | length 1236.1
  Bottom Layer w35: U2.14 2139.85,735.15 3150.15,735.15 J9.6
NetJ9_7: J9.7 U2.16 | length 1740.7
  Top Layer w35: U2.16 2782.63,502.37 2782.63,215 2822.63,175 3001,175 3041,215 3041,526 J9.7
NetP1_2: P1.2 P2.1 | length 497.3
  Bottom Layer w35: P1.2 654.06,295 750.94,295 P2.1
NetP2_2: P2.2 Q1.3 R9.2 U1.7 U3.1 | length 2764
  Bottom Layer w35: U3.1 319.06,905 P2.2 890.9,534.96 1231.89,534.96 R9.2 1418.15,461.85 Q1.3 1665,466 1710,511 2024,511 U1.7
NetQ1_2: Q1.2 U1.3 | length 330.4
  Bottom Layer w35: Q1.2 1632,165 1638,159 1834,159 U1.3
NetR2_1: "Start Button.1" R2.1 U2.5 | length 1866.1
  Bottom Layer w35: 360,1890 562,1688 1261.15,1688 R2.1 1411.85,1695 U2.5
NetR7_1: R7.1 U1.2 U1.6 U2.13 | length 1756.1
  Top Layer w35: U1.2 1994,419 1994,809 U2.13
  Bottom Layer w35: R7.1 1446.85,895 U2.13 ; U1.2 2005,230 U1.6
pads on no net: U1.1 U1.5 U1.8 U2.2 U2.3 U2.4 U2.23 U2.24 U2.25 U2.26 U2.27 U2.28

## Keep-outs
Top Layer:
  lines w10: 0,0 0,2375 3610,2375 3610,-5 3605,0 0,0

## Silkscreen, mask and mechanical layers (free items; w line width, h text height)
Top Overlay:
  text "ECE1895 Team Omega Circ-it!" at 560,2299.99 h60